# Altium PCB A8_v1.0.PcbDoc
Units mm, origin at the board's own origin, x right, y up, seen from the top; angles counter-clockwise.
Board outline 35.25 x 35.25 mm, 2 copper layers (Top Layer, Bottom Layer); 5 components, 23 nets, 58 pads, 10 vias.
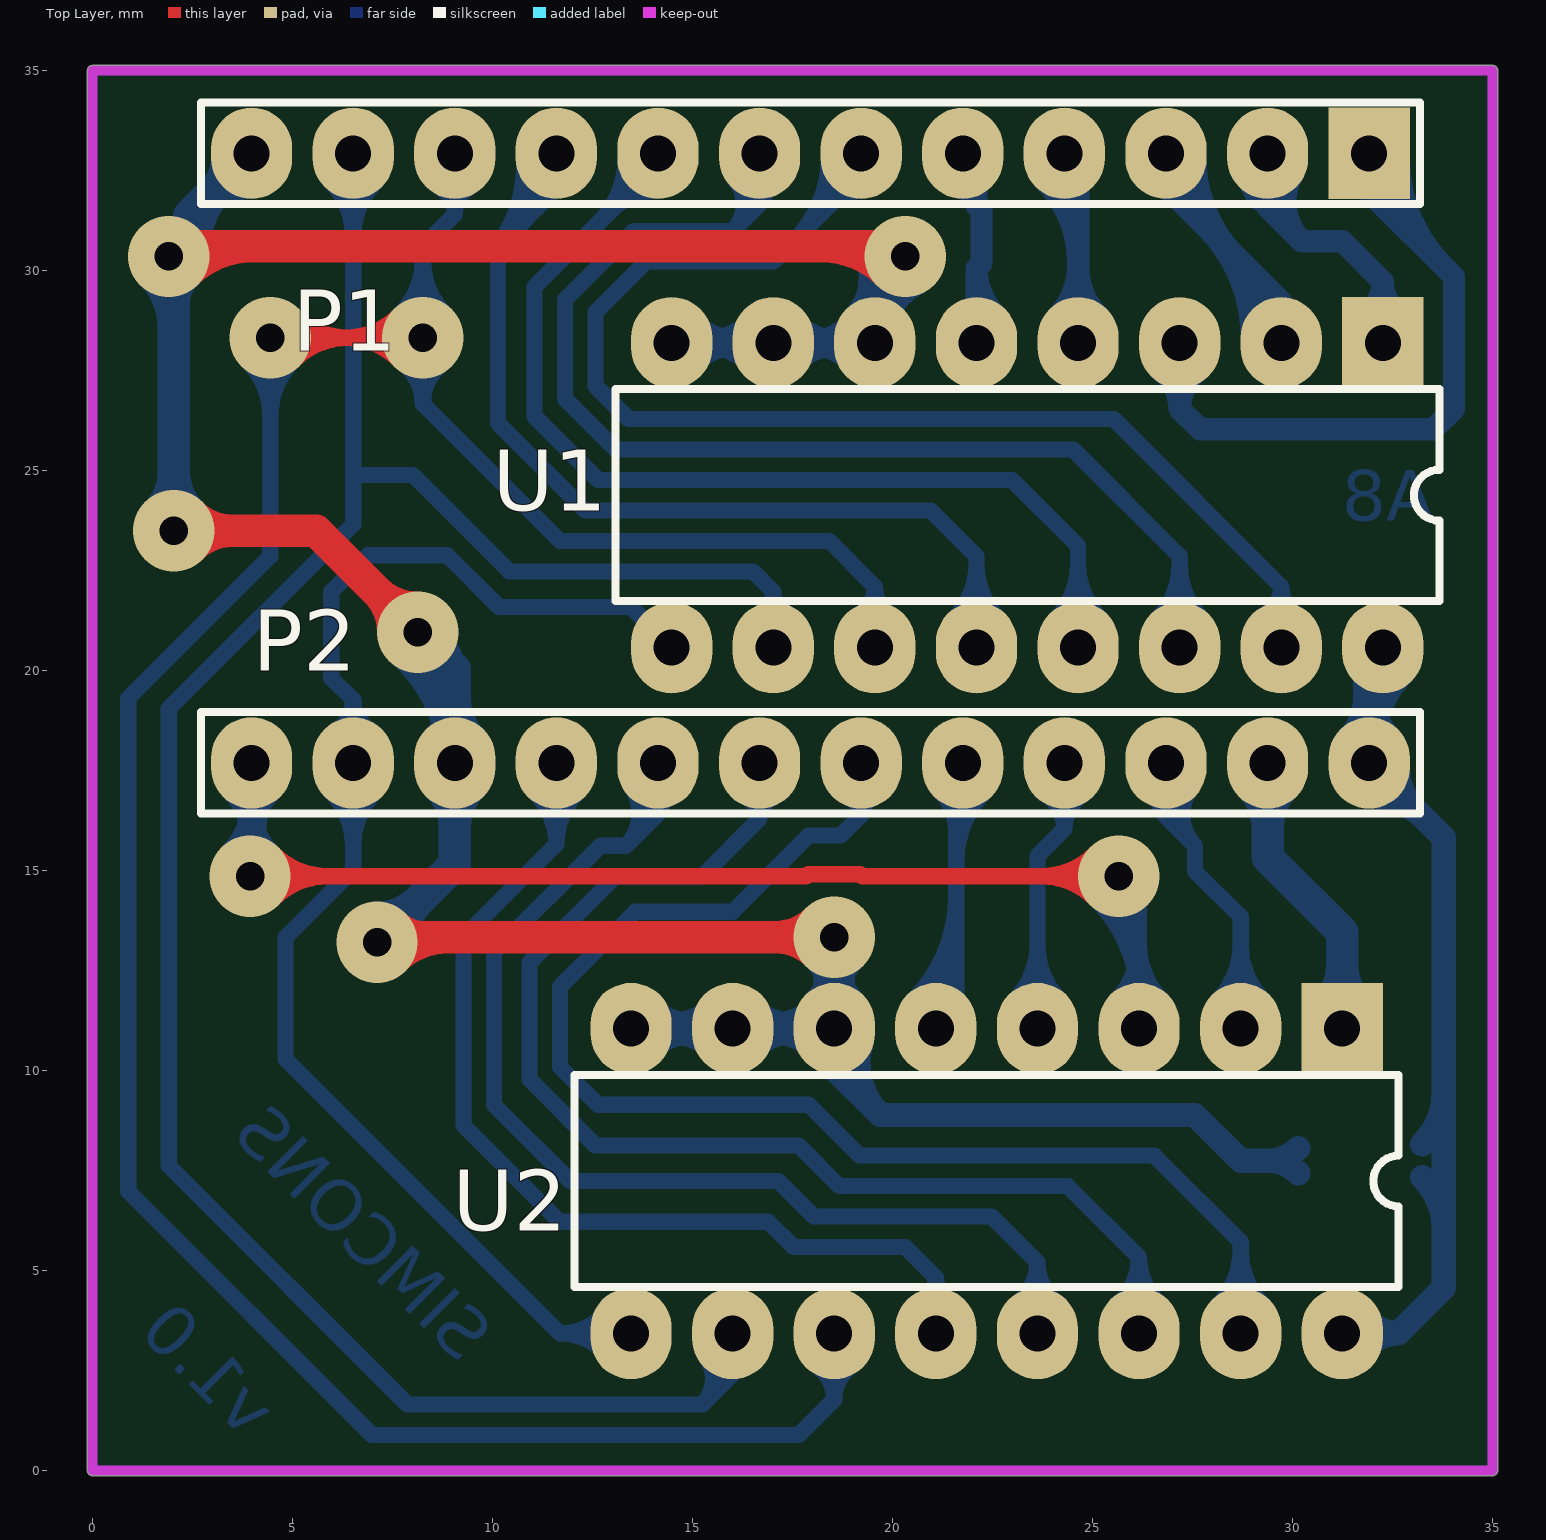
[diagram p0: Top Layer view]
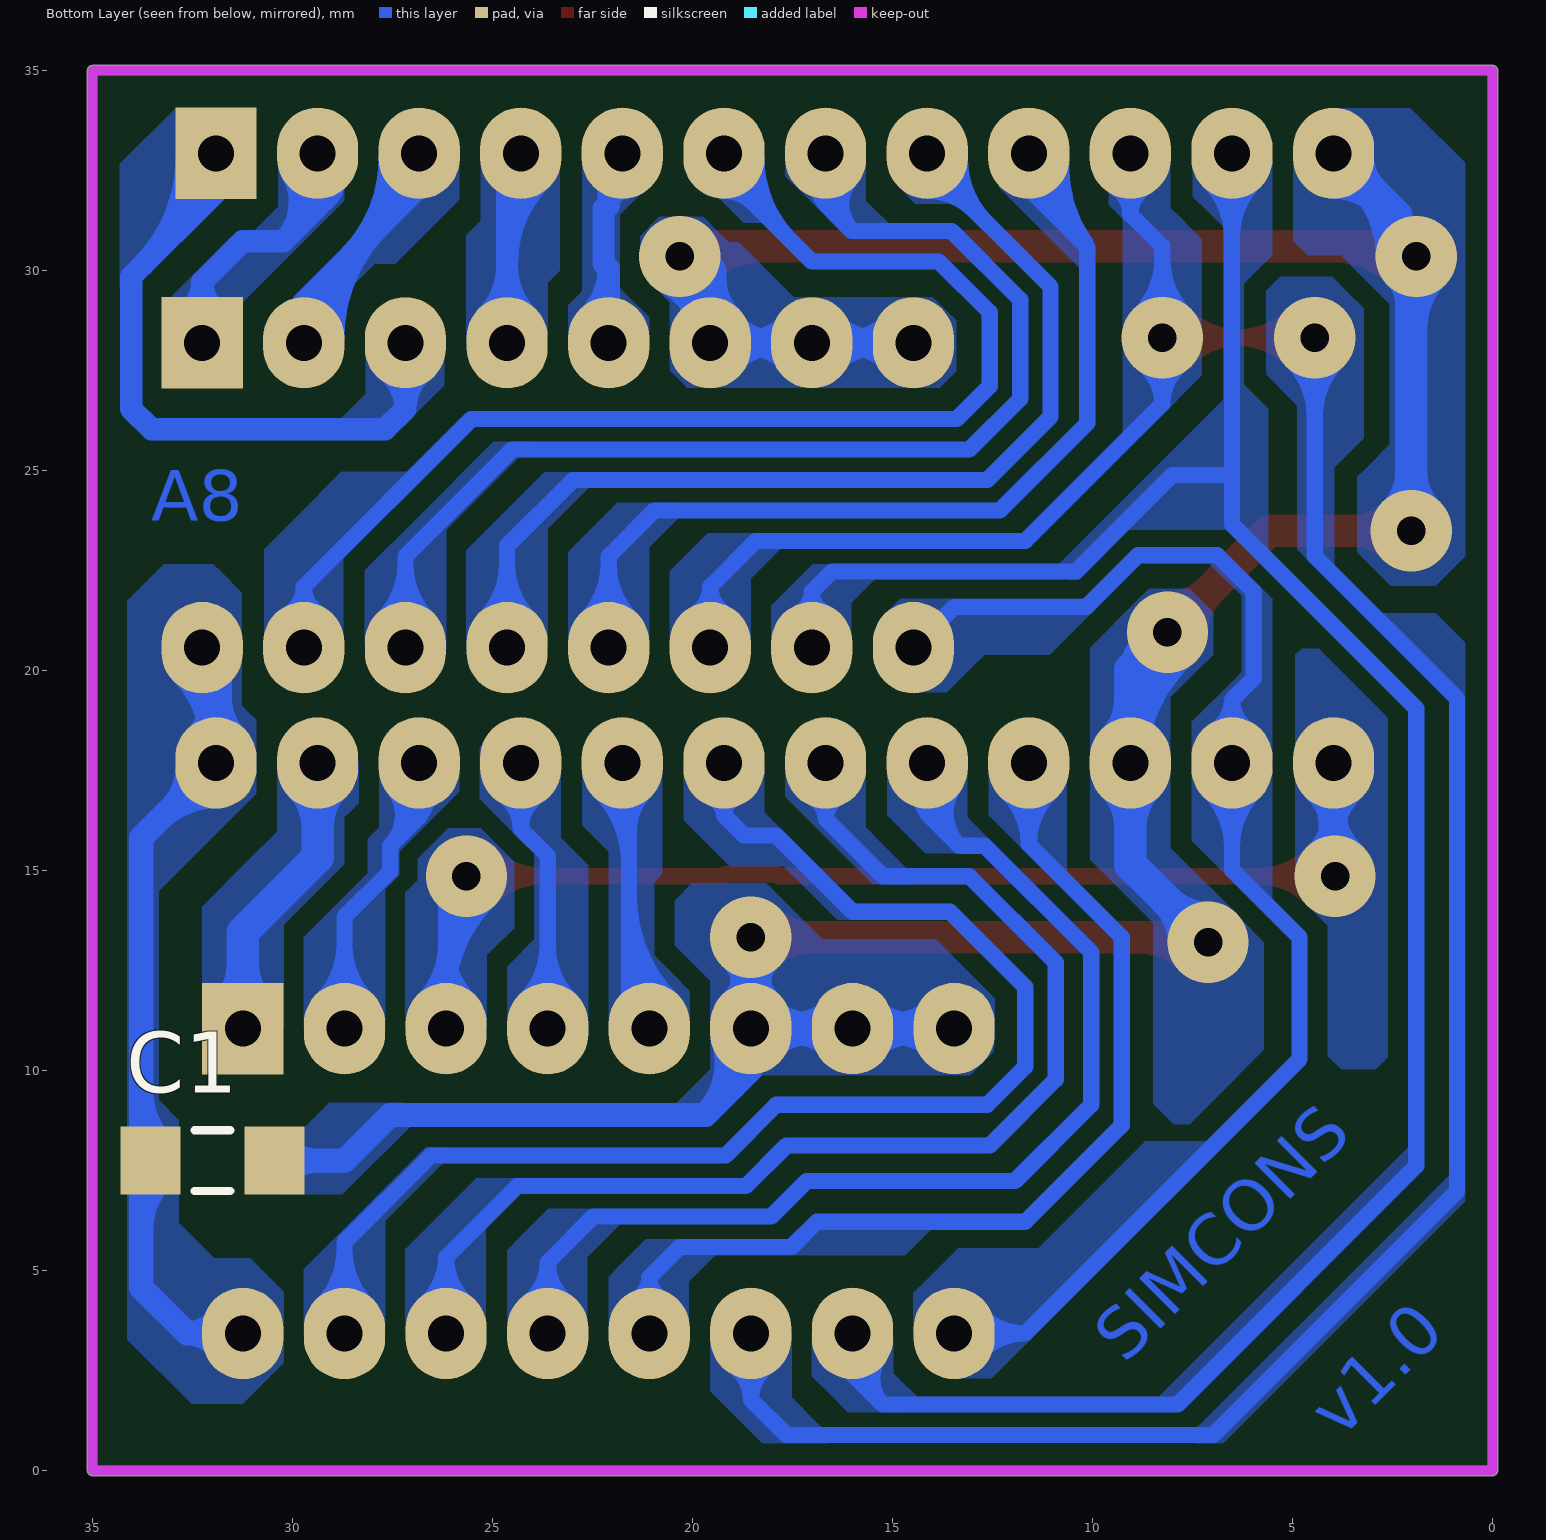
[diagram p1: Bottom Layer view, seen from below]

## Layer stack, top to bottom
Top Solder: solder mask 0.0102, Solder Resist, Dk 3.5
Top Layer: signal copper 0.0356
Dielectric 1: dielectric 0.32, FR-4, Dk 4.8
Bottom Layer: signal copper 0.0356
Bottom Solder: solder mask 0.0102, Solder Resist, Dk 3.5

## Board outline
0,-0.127 cw(c0,0) -0.127,0 -0.127,35 cw(c0,35) 0,35.127 35,35.127 cw(c35,35) 35.127,35 35.127,0 cw(c35,0) 35,-0.127

## Design rules (kind name [scope] priority, off if disabled: settings)
Clearance [All] p1: gap=0.356
PolygonConnect [All] p1: connectstyle=Direct reliefconductorwidth=0.254 reliefentries=4 polygonreliefangle="90 Angle" airgapwidth=0.254
RoutingVias [All] p1: holewidth=0.711 width=2.286 viastyle="Through Hole" minholewidth=0.711 minwidth=1.524 maxholewidth=0.711 maxwidth=2.794
SolderMaskExpansion [All] p1: expansion=0.102
Width [All] p1: maxlimit=1.626 minlimit=0.406 preferedwidth=0.813
29 further rules are at their usual default settings.

## Components (designator, comment, footprint, x,y, rotation, side; value= is the part's Value field where it differs from the comment)
C1 ".1uF 1206" C1206_W 32.004,7.747 r0 bottom
P1 "Header 12" HDR1X12#1 31.915,32.931 r180 top
P2 "Header 12" HDR1X12#2 3.975,17.691 r0 top
U1 "HCF4051BEY" DIP16 23.368,24.384 r180 top
U2 "HCF4051BEY" DIP16 22.352,7.239 r180 top

## Footprints (in the part's own frame and the unit in brackets; to place one, negate y for a bottom-side part, rotate by r counter-clockwise, add the part's x,y. Pads: shape width x height; smd on the part's side, far side on the other; paste and mask are expansions set on the pad)
C1206_W [mm] "Chip Capacitor, Body 3.2x1.6mm, IPC High Density"
  rect 1.5x1.7 smd: 1(-1.55,0) 2(1.55,0)
  silkscreen extent -0.44,-0.76 0.44,0.76, body extent -1.6,-0.8 1.6,0.8, height 1
DIP16 [mil] "DIP; 16 Leads; Row Spacing 7.62 mm; Pitch 2.54 mm"
  rect 80x90 hole 35.43: 1(-350,-150)
  oval 80x90 hole 35.43: 2(-250,-150) 3(-150,-150) 4(-50,-150) 5(50,-150) 6(150,-150) 7(250,-150) 8(350,-150) 9(350,150) 10(250,150) 11(150,150) 12(50,150) 13(-50,150) 14(-150,150) 15(-250,150) 16(-350,150)
  silkscreen extent -406,-104 406,104
HDR1X12#1 [mil] "Connector; Header; 12 Position"
  rect 80x90 hole 35.43: 1(0,0)
  oval 80x90 hole 35.43: 2(100,0) 3(200,0) 4(300,0) 5(400,0) 6(500,0) 7(600,0) 8(700,0) 9(800,0) 10(900,0) 11(1000,0) 12(1100,0)
  silkscreen extent -50,-50 1150,50
HDR1X12#2 [mil] "Connector; Header; 12 Position"
  oval 80x90 hole 35.43: 1(0,0) 2(100,0) 3(200,0) 4(300,0) 5(400,0) 6(500,0) 7(600,0) 8(700,0) 9(800,0) 10(900,0) 11(1000,0) 12(1100,0)
  silkscreen extent -50,-50 1150,50

## Part data
C1: library part Cap, "Capacitor"
P1 P2: "Header, 12-Pin"
U1 U2: "Analog Multiplexer/Demultiplexer"

## Via types
v1: diameter 2.032, hole 0.711, Top Layer to Bottom Layer, 10 vias

## Nets (pads, with @x,y where several pads share a name; then routed paths per layer and width w, separated by ;. In a path a pad name is that pad's centre, name@x,y a point inside that pad or via, vN(x,y) a via of type N, cw(c..) or ccw(c..) an arc to the next point about the centre after c; other vN are vias at no path point)
BAT: P2.7 U2.15 | length 37.9
  Bottom Layer w0.406: P2.7@18.925,16.805 cw(c18.763,16.383) 19.215,16.383 ; P2.7 19.215,16.383 ; P2.7@19.505,16.805 ccw(c19.667,16.383) 19.215,16.383 ; U2.15@28.127,4.131 ccw(c26.74,5.518) 28.702,5.518 ccw(c30.664,5.518) U2.15@29.277,4.131 ; U2.15 28.702,5.715 26.543,7.874 19.177,7.874 17.907,9.144 12.635,9.144 11.684,10.095 11.684,12.09 13.564,13.97 16.002,13.97 17.907,15.875 18.707,15.875 19.215,16.383
BTSBATT: P2.5 U2.13 | length 35.4
  Bottom Layer w0.406: P2.5@13.467,17.1 cw(c12.516,16.44) 13.335,15.621 ; 13.679,15.965 ccw(c12.922,16.722) P2.5@13.801,17.332 ; P2.5@13.868,16.796 cw(c13.738,16.421) 14.135,16.421 ; 14.023,16.309 ccw(c13.328,17.004) P2.5@14.135,17.564 ; P2.5 14.135,16.421 ; P2.5@14.402,16.796 ccw(c14.532,16.421) 14.135,16.421 ; U2.13@23.126,4.2 ccw(c22.352,5.207) 23.622,5.207 ; U2.13 23.622,5.207 ; U2.13@24.118,4.2 cw(c24.892,5.207) 23.622,5.207 ; 13.335,15.621 14.135,16.421 ; 13.335,15.621 12.7,15.621 10.033,12.954 10.033,9.144 11.938,7.239 17.145,7.239 18.034,6.35 22.479,6.35 23.622,5.207
COMM: P1.1 U1.3 | length 23.3
  Bottom Layer w0.559: U1.3@26.72,27.49 cw(c25.97,26.543) 27.178,26.543 ; U1.3 27.178,26.543 ; U1.3@27.636,27.49 ccw(c28.386,26.543) 27.178,26.543 ; P1.1 31.915,31.966 34.036,29.845 34.036,26.543 33.528,26.035 27.686,26.035 27.178,26.543 ; P1.1@32.093,32.804 ccw(c34.545,32.804) 32.811,31.07 ; P1.1@32.652,32.804 ccw(c36.453,32.804) 33.765,30.116
DG-B_: P1.5 U1.5 | length 6.5
  Bottom Layer w0.559: P1.5@21.688,32.07 cw(c21.647,31.621) 22.098,31.621 ; U1.5 22.098,30.05 ; P1.5@22.098,32.588 22.098,31.672 22.225,31.545 22.225,30.177 22.098,30.05 ; U1.5@22.608,28.852 cw(c23.759,30.05) 22.098,30.05
DG-R_: P1.7 U1.14 | length 37
  Bottom Layer w0.406: P1.7@16.055,32.278 cw(c15.328,31.662) 16.002,30.988 ; 16.314,31.3 ccw(c15.666,31.948) P1.7@16.365,32.541 ; P1.7@16.408,32.036 cw(c16.278,31.661) 16.675,31.661 ; 16.626,31.612 ccw(c16.003,32.235) P1.7@16.675,32.804 ; P1.7 16.675,31.661 ; P1.7@16.942,32.036 ccw(c17.072,31.661) 16.675,31.661 ; U1.14@26.603,21.276 ccw(c25.216,22.663) 27.178,22.663 ccw(c29.14,22.663) U1.14@27.753,21.276 ; U1.14 27.178,22.86 24.511,25.527 13.081,25.527 11.811,26.797 11.811,29.272 13.527,30.988 16.002,30.988 ; 16.002,30.988 16.675,31.661
DG-Y_: P1.6 U1.15 | length 37.4
  Bottom Layer w0.406: 17.558,30.766 ccw(c15.52,32.804) P1.6@18.402,32.804 ; 18.252,31.46 ccw(c16.908,32.804) P1.6@18.809,32.804 ; 18.478,31.686 cw(c19.215,30.949) P1.6@19.215,31.991 ; P1.6 19.215,32.423 17.018,30.226 13.843,30.226 12.573,28.956 12.573,27.113 13.397,26.289 25.527,26.289 29.718,22.098 ; U1.15@29.316,21.408 ccw(c28.924,22.098) 29.718,22.098 ; U1.15 29.718,22.098 ; U1.15@30.12,21.408 cw(c30.512,22.098) 29.718,22.098
EB-B_: P1.2 U1.1 | length 14.6
  Bottom Layer w0.559: P1.2@29.032,32.152 cw(c28.735,31.585) 29.375,31.585 ; P1.2@29.047,32.997 ccw(c29.928,32.478) 29.205,31.755 ; P1.2 29.375,31.585 ; P1.2@29.528,32.714 ccw(c30.571,32.1) 29.715,31.245 ; P1.2@29.718,32.152 ccw(c30.015,31.585) 29.375,31.585 ; P1.2@30.01,32.43 ccw(c31.214,31.722) 30.226,30.734 ; U1.1@31.842,28.929 ccw(c31.302,29.718) 32.258,29.718 ; U1.1 32.258,29.718 ; U1.1@32.674,28.929 cw(c33.214,29.718) 32.258,29.718 ; 29.375,31.585 30.226,30.734 ; 30.226,30.734 31.242,30.734 32.258,29.718
EB-R_: P1.4 U1.4 | length 10.8
  Bottom Layer w0.559: P1.4@23.774,32.283 cw(c21.689,30.198) 24.638,30.198 ; U1.4@24.117,28.842 ccw(c22.86,30.099) 24.638,30.099 ccw(c26.416,30.099) U1.4@25.159,28.842 ; P1.4@24.169,32.678 cw(c23.038,31.547) 24.638,31.547 ; U1.4 P1.4@24.638,32.588
EB-Y_: P1.3 U1.2 | length 15.5
  Bottom Layer w0.559: P1.3 26.835,32.093 29.718,29.21 U1.2 ; P1.3@27.013,32.804 ccw(c29.159,32.804) 27.641,31.287 ; P1.3@27.572,32.804 ccw(c31.066,32.804) 28.595,30.333 ; 27.832,31.096 cw(c25.057,28.321) U1.2@28.981,28.321 ; 28.786,30.142 cw(c26.965,28.321) U1.2@29.54,28.321
EMSTP: P2.8 U2.5 | length 17.6
  Bottom Layer w0.406: U2.5@20.507,11.751 ccw(c17.893,14.365) 21.59,14.365 ; U2.5@20.795,11.463 ccw(c18.874,13.384) 21.59,13.384 ; U2.5 21.59,11.557 21.59,17.526 P2.8 ; U2.5@21.082,11.176 ccw(c19.856,12.402) 21.59,12.402 ; P2.8@21.18,16.989 cw(c20.191,16) 21.59,16 ; 21.59,15.203 cw(c24.116,15.203) P2.8@22.33,16.989 ; 21.59,16.185 cw(c23.134,16.185) P2.8@22.042,17.277
FLDIR: P2.4 U2.12 | length 29.1
  Bottom Layer w0.406: P2.4@11.033,16.977 cw(c9.769,15.659) 11.595,15.659 ; P2.4 11.595,15.659 ; P2.4@12.157,16.977 ccw(c13.421,15.659) 11.595,15.659 ; U2.12@20.742,4.294 ccw(c20.496,4.826) 21.082,4.826 ; U2.12 21.082,4.826 ; U2.12@21.422,4.294 cw(c21.668,4.826) 21.082,4.826 ; 11.595,15.659 9.271,13.335 9.271,8.636 11.684,6.223 16.891,6.223 17.526,5.588 20.32,5.588 21.082,4.826
FLG: P2.6 U2.14 | length 34.5
  Bottom Layer w0.406: P2.6@16.335,16.826 cw(c16.089,16.294) 16.675,16.294 ; P2.6 16.675,16.294 ; P2.6@17.015,16.826 ccw(c17.261,16.294) 16.675,16.294 ; U2.14@25.63,4.171 ccw(c24.624,5.334) 26.162,5.334 ; U2.14 26.162,5.334 ; U2.14@26.694,4.171 cw(c27.7,5.334) 26.162,5.334 ; 16.675,16.294 15.24,14.859 13.081,14.859 10.922,12.7 10.922,9.779 12.573,8.128 17.653,8.128 18.669,7.112 24.384,7.112 26.162,5.334
FLT1: P1.8 U1.13 | length 32.5
  Bottom Layer w0.406: 12.658,31.2 ccw(c11.053,32.804) P1.8@13.322,32.804 ; 12.964,31.506 cw(c14.135,30.336) P1.8@14.135,31.991 ; 13.351,31.893 ccw(c12.441,32.804) P1.8@13.729,32.804 ; P1.8 14.135,32.677 11.049,29.591 11.049,26.351 12.635,24.765 22.987,24.765 24.638,23.114 U1.13 ; U1.13@24.063,21.276 ccw(c22.676,22.663) 24.638,22.663 ccw(c26.6,22.663) U1.13@25.213,21.276
GND: C1.1 P1.12 P2.3 U1.6 U1.7 U1.8 U2.6 U2.7 U2.8 | length 163.4
  Top Layer w0.813: v1(1.905,30.353) 2.159,30.353 2.413,30.607 20.447,30.607 20.32,30.48 v1(20.32,30.353) ; v1(2.032,23.495) 5.588,23.495 v1(8.128,20.955) ; v1@2.336,29.922 cw(c3.99,28.268) 3.99,30.607 ; v1@2.463,23.064 cw(c3.504,22.023) 3.504,23.495 cw(c3.504,24.967) v1@2.463,23.926 ; v1(7.112,13.208) 7.239,13.335 v1(18.542,13.335) ; v1@7.518,20.955 ccw(c6.047,20.955) 7.087,21.996 ccw(c8.128,23.036) v1@8.128,21.565 ; v1@7.543,12.777 cw(c8.89,11.43) 8.89,13.335 ; v1@7.543,13.639 ccw(c8.277,14.373) 8.277,13.335 ; v1@18.111,12.904 ccw(c17.07,11.863) 17.07,13.335 ccw(c17.07,14.807) v1@18.111,13.766 ; 18.235,30.607 cw(c18.235,28.268) v1@19.889,29.922
  Bottom Layer w0.559: U1.8 U1.7 U1.6 ; U1.8@14.999,27.673 cw(c16.256,26.416) 16.256,28.194 cw(c16.256,29.972) U1.8@14.999,28.715 ; 15.902,28.099 cw(c15.988,27.778) U1.7@16.309,27.868 ; 15.902,28.289 ccw(c15.988,28.61) U1.7@16.309,28.52 ; 15.963,28.115 ccw(c15.786,28.778) U1.7@16.38,28.435 ; 15.963,28.273 cw(c15.786,27.61) U1.7@16.38,27.953 ; U1.7@16.497,27.673 ccw(c15.24,26.416) 15.24,28.194 ccw(c15.24,29.972) U1.7@16.497,28.715 ; U1.7@17.539,27.673 cw(c18.796,26.416) 18.796,28.194 cw(c18.796,29.972) U1.7@17.539,28.715 ; 18.442,28.099 cw(c18.528,27.778) U1.6@18.849,27.868 ; 18.442,28.289 ccw(c18.528,28.61) U1.6@18.849,28.52 ; 18.503,28.115 ccw(c18.326,28.778) U1.6@18.92,28.435 ; 18.503,28.273 cw(c18.326,27.61) U1.6@18.92,27.953 ; U1.6@19.037,27.673 ccw(c17.78,26.416) 17.78,28.194 ccw(c17.78,29.972) U1.6@19.037,28.715
  Bottom Layer w0.61: U2.6 18.542,10.033 19.685,8.89 ; U2.6@18.639,10.893 ccw(c19.874,10.523) 18.963,9.612 ; U2.6@19.223,10.718 ccw(c20.986,10.191) 19.685,8.89 ; C1.1@29.972,7.874 29.845,7.747 28.702,7.747 27.559,8.89 19.685,8.89 ; C1.1@30.139,7.432 ccw(c29.379,6.672) 29.379,7.747 ccw(c29.379,8.822) C1.1@30.139,8.062
  Bottom Layer w0.813: v1@1.474,29.922 cw(c0.127,28.575) 2.032,28.575 ; v1@1.601,23.926 ccw(c0.56,24.967) 2.032,24.967 ccw(c3.504,24.967) v1@2.463,23.926 ; v1(2.032,23.495) 2.032,30.226 2.413,30.607 2.413,31.369 P1.12 ; 2.032,29.188 cw(c3.07,29.188) v1@2.336,29.922 ; v1@2.515,30.353 cw(c5.213,30.353) P1.12@3.305,32.261 ; 2.718,31.674 cw(c3.975,30.416) P1.12@3.975,32.194 ; 3.024,31.98 ccw(c2.2,32.804) P1.12@3.365,32.804 ; v1(7.112,13.208) 9.055,15.151 P2.3 9.055,20.028 v1(8.128,20.955) ; v1@7.112,13.818 ccw(c7.112,15.289) 8.153,14.249 ccw(c9.193,13.208) v1@7.722,13.208 ; v1@7.726,20.497 cw(c5.15,17.562) P2.3@9.055,17.562 ; v1@8.262,21.108 cw(c6.725,19.357) 9.055,19.357 ; P2.3@8.624,17.133 cw(c7.583,16.092) 9.055,16.092 cw(c10.527,16.092) P2.3@9.486,17.133 ; P2.3@8.624,18.249 ccw(c7.583,19.29) 9.055,19.29 ccw(c10.527,19.29) P2.3@9.486,18.249 ; U2.8 U2.7 U2.6 v1(18.542,13.335) ; U2.8@13.893,10.618 cw(c14.934,9.577) 14.934,11.049 cw(c14.934,12.521) U2.8@13.893,11.48 ; U2.7@15.571,10.618 ccw(c14.53,9.577) 14.53,11.049 ccw(c14.53,12.521) U2.7@15.571,11.48 ; U2.7@16.433,10.618 cw(c17.474,9.577) 17.474,11.049 cw(c17.474,12.521) U2.7@16.433,11.48 ; U2.6@18.111,10.618 ccw(c17.07,9.577) 17.07,11.049 ccw(c17.07,12.521) U2.6@18.111,11.48 ; U2.6@18.111,11.607 ccw(c17.07,12.648) 18.542,12.648 ccw(c20.014,12.648) U2.6@18.973,11.607 ; v1@18.111,12.904 cw(c17.07,11.863) 18.542,11.863 cw(c20.014,11.863) v1@18.973,12.904 ; v1@18.195,12.834 cw(c17.867,12.359) 18.425,12.21 ; v1@18.237,12.807 cw(c17.805,12.059) 18.64,12.282 ; 18.444,12.282 cw(c19.279,12.059) v1@18.847,12.807 ; 18.659,12.209 cw(c19.217,12.359) v1@18.889,12.834 ; U1.6@19.127,28.752 ccw(c18.086,29.793) 19.558,29.793 ccw(c21.03,29.793) U1.6@19.989,28.752 ; U1.6@19.558,28.064 cw(c21.545,28.064) v1@20.608,29.815 ; U1.6 19.558,29.972 19.685,29.972 v1@20.447,30.734 ; 19.558,29.42 cw(c20.819,29.42) v1@20.224,30.532 ; v1(20.32,30.353) 20.32,30.48 20.447,30.607 v1@20.447,30.734 ; v1@20.574,30.861 v1@20.447,30.734
HT: P1.9 U1.12 | length 31.7
  Bottom Layer w0.406: 10.178,30.692 ccw(c7.476,32.606) P1.9@10.783,32.765 ; 10.466,30.913 ccw(c8.714,32.665) P1.9@11.189,32.784 ; 11.115,31.562 ccw(c9.953,32.725) P1.9@11.595,32.804 ; P1.9 11.595,32.042 10.135,30.582 10.135,26.187 12.319,24.003 20.955,24.003 22.098,22.86 U1.12 ; U1.12@21.523,21.276 ccw(c20.136,22.663) 22.098,22.663 ccw(c24.06,22.663) U1.12@22.673,21.276
LLOP: P2.10 U2.2 | length 16.2
  Bottom Layer w0.406: P2.10@26.523,16.814 cw(c26.327,16.345) 26.835,16.345 ; P2.10@26.835,17.564 ccw(c27.603,16.959) 26.912,16.268 ; P2.10 26.835,16.345 ; P2.10@27.147,16.814 ccw(c27.343,16.345) 26.835,16.345 ; P2.10@27.154,17.313 ccw(c27.965,16.674) 27.235,15.945 ; P2.10@27.474,17.061 ccw(c28.327,16.389) 27.559,15.621 ; U2.2@28.127,11.751 ccw(c26.74,13.138) 28.702,13.138 ccw(c30.664,13.138) U2.2@29.277,11.751 ; U2.2 28.702,13.843 27.559,14.986 27.559,15.621 ; 26.835,16.345 27.559,15.621
REMOT: P2.9 U2.4 | length 12
  Bottom Layer w0.406: U2.4@23.047,11.751 ccw(c21.66,13.138) 23.622,13.138 ccw(c25.584,13.138) U2.4@24.197,11.751 ; U2.4 23.622,15.367 24.295,16.04 ; P2.9@23.842,16.889 cw(c23.273,16.04) 24.295,16.04 ; P2.9 24.295,16.04 ; P2.9@24.748,16.889 ccw(c25.317,16.04) 24.295,16.04
RSTART: P2.11 U2.1 | length 12
  Bottom Layer w0.813: P2.11@28.944,17.133 cw(c27.903,16.092) 29.375,16.092 cw(c30.847,16.092) P2.11@29.806,17.133 ; P2.11 29.375,15.329 31.242,13.462 U2.1 ; U2.1@30.811,11.607 ccw(c29.77,12.648) 31.242,12.648 ccw(c32.714,12.648) U2.1@31.673,11.607
S0: P1.10 U1.11 U2.11 | length 90.1
  Top Layer w0.406: v1(4.445,28.321) v1(8.255,28.321) ; v1@5.02,27.746 cw(c6.407,26.359) 6.407,28.321 cw(c6.407,30.283) v1@5.02,28.896 ; v1@7.68,27.746 ccw(c6.293,26.359) 6.293,28.321 ccw(c6.293,30.283) v1@7.68,28.896
  Bottom Layer w0.406: v1@3.87,27.746 cw(c2.483,26.359) 4.445,26.359 cw(c6.407,26.359) v1@5.02,27.746 ; v1(4.445,28.321) 4.445,22.86 0.889,19.304 0.889,6.985 6.985,0.889 17.653,0.889 18.542,1.778 ; v1@7.68,28.896 ccw(c6.293,30.283) 8.255,30.283 ccw(c10.217,30.283) v1@8.83,28.896 ; v1@7.759,27.677 cw(c6.985,26.67) 8.255,26.67 ; P1.10@8.653,32.097 cw(c8.261,31.407) 9.055,31.407 ; v1@8.751,27.677 ccw(c9.525,26.67) 8.255,26.67 ; P1.10 9.055,31.407 ; P1.10@9.457,32.097 ccw(c9.849,31.407) 9.055,31.407 ; U2.11@18.089,2.627 cw(c17.52,1.778) 18.542,1.778 ; U2.11 18.542,1.778 ; U2.11@18.995,2.627 ccw(c19.564,1.778) 18.542,1.778 ; U1.11@19.156,21.408 ccw(c18.764,22.098) 19.558,22.098 ; U1.11 19.558,22.098 ; U1.11@19.96,21.408 cw(c20.352,22.098) 19.558,22.098 ; 8.255,26.67 11.684,23.241 18.415,23.241 19.558,22.098 ; 8.255,26.67 v1(8.255,28.321) 8.255,30.607 9.055,31.407
S1: P1.11 U1.10 U2.10 | length 65.1
  Bottom Layer w0.406: P1.11@5.94,32.229 cw(c4.553,30.842) 6.515,30.842 cw(c8.477,30.842) P1.11@7.09,32.229 ; P1.11 6.515,24.892 ; U2.10@15.339,2.831 cw(c14.591,2.3) 15.24,1.651 ; 15.58,1.991 ccw(c14.989,2.582) U2.10@15.671,3.067 ; U2.10 16.002,2.413 15.24,1.651 ; U1.10@16.678,21.439 ccw(c16.432,21.971) 17.018,21.971 ; U1.10 17.018,21.971 ; U1.10@17.358,21.439 cw(c17.604,21.971) 17.018,21.971 ; 6.515,24.892 6.515,23.66 1.905,19.05 1.905,7.62 7.874,1.651 15.24,1.651 ; 6.515,24.892 8.001,24.892 10.414,22.479 16.51,22.479 17.018,21.971
S2: P2.2 U1.9 U2.9 | length 41.5
  Bottom Layer w0.406: P2.2@5.94,16.989 cw(c4.553,15.602) 6.515,15.602 cw(c8.477,15.602) P2.2@7.09,16.989 ; P2.2@6.092,18.512 ccw(c5.632,19.266) 6.515,19.266 ; P2.2@6.938,18.512 cw(c7.398,19.266) 6.515,19.266 ; U2.9@12.847,2.897 ccw(c11.684,1.891) 11.684,3.429 ; U2.9@12.847,3.961 cw(c11.684,4.967) 11.684,3.429 ; U2.9 11.684,3.429 ; U1.9 13.462,21.59 10.16,21.59 8.865,22.885 6.883,22.885 5.969,21.971 5.969,19.812 6.515,19.266 ; 6.515,19.266 P2.2 6.515,15.024 4.826,13.335 4.826,10.287 11.684,3.429
S3: P2.1 U2.3 | length 54.7
  Top Layer w0.406: v1(3.937,14.859) 17.839,14.859 17.89,14.91 19.194,14.91 19.245,14.859 v1(25.654,14.859) ; v1@4.512,14.284 cw(c5.899,12.897) 5.899,14.859 cw(c5.899,16.821) v1@4.512,15.434 ; v1@25.079,14.284 ccw(c23.692,12.897) 23.692,14.859 ccw(c23.692,16.821) v1@25.079,15.434
  Bottom Layer w0.406: v1@3.362,15.434 ccw(c1.883,16.913) P2.1@3.975,16.913 ; P2.1@3.4,16.989 cw(c2.013,15.602) 3.975,15.602 cw(c5.937,15.602) P2.1@4.55,16.989 ; v1@3.546,15.572 ccw(c3.281,16.057) 3.815,16.2 ccw(c4.768,16.455) v1@4.312,15.58 ; v1@3.569,15.584 ccw(c3.04,16.625) 4.168,16.323 ccw(c4.934,16.117) v1@4.442,15.496 ; v1@3.65,15.146 ccw(c2.864,15.932) 3.975,15.932 ; P2.1@3.975,16.73 ccw(c5.808,16.73) v1@4.512,15.434 ; P2.1 3.975,15.113 3.937,15.113 v1@4.064,14.986 ; v1@25.079,14.284 cw(c22.465,11.67) U2.3@26.162,11.67 ; v1@25.367,14.572 cw(c23.446,12.651) 26.162,12.651 ; U2.3@25.587,11.751 ccw(c24.2,13.138) 26.162,13.138 ccw(c28.124,13.138) U2.3@26.737,11.751 ; U2.3 26.162,14.351 v1(25.654,14.859) cw(c24.428,13.633) 26.162,13.633
VCC: C1.2 P2.12 U1.16 U2.16 | length 31.8
  Bottom Layer w0.61: U2.16 32.639,3.429 ; U2.16@31.817,3.011 cw(c32.639,2.413) 32.639,3.429 ; U2.16@31.817,3.847 ccw(c32.639,4.445) 32.639,3.429 ; P2.12@31.915,16.853 cw(c31.915,14.829) 33.346,16.26 ; P2.12 33.782,15.824 33.782,4.572 32.639,3.429 ; P2.12@32.626,17.564 ccw(c34.037,17.564) 33.039,16.567 ; C1.2@33.239,7.332 cw(c31.929,6.022) 33.782,6.022 ; C1.2@33.239,8.162 ccw(c31.929,9.472) 33.782,9.472
  Bottom Layer w0.813: P2.12@31.484,18.249 ccw(c30.443,19.29) 31.915,19.29 ccw(c33.387,19.29) P2.12@32.346,18.249 ; P2.12 31.915,20.231 U1.16 ; P2.12@31.915,18.147 cw(c34.558,18.147) U1.16@32.689,20.016
copper on no net: | length 139.9
  Bottom Layer w0.254: 0,0 0,35 35,35 35,0 0.138,0

## Polygon pours and split planes (outlines as drawn)
DG-B_ on Bottom Layer "Top Layer-No Net 1" (solid, remove dead copper, pour order 2): 21.946,31.267 21.057,32.156 21.057,32.918 22.657,32.918 22.758,33.02 22.758,29.489 22.835,29.413 23.114,29.134 23.114,28.143 22.581,28.143 21.971,28.753 21.844,28.88 21.844,29.997 21.844,30.15 22.022,30.328
COMM on Bottom Layer "Top Layer-No Net 1" (solid, remove dead copper, pour order 4): 26.213,27.94 26.213,27.127 27.457,25.883 27.483,25.857 29.54,25.857 29.54,26.238 29.489,26.289 28.804,26.289 28.321,26.772 28.169,26.924 28.169,28.245 26.772,28.245 26.619,28.397
EB-B_ on Bottom Layer "Top Layer-No Net 1" (solid, remove dead copper, pour order 6): 31.267,29.185 28.702,31.75 28.702,31.928 28.702,32.563 28.956,32.817 29.464,32.309 29.515,32.309 30.175,32.969 30.226,32.918 30.277,32.918 30.353,32.842 30.353,31.598 31.115,30.836 31.547,30.836 33.045,29.337 33.122,29.261 33.122,28.829
GND on Bottom Layer "Top Layer-No Net 1" (solid, remove dead copper, pour order 8): 20.422,31.344 19.736,31.344 19.329,30.937 19.101,30.709 18.847,30.709 17.475,29.337 16.535,29.337 13.995,29.337 13.64,28.981 13.411,28.753 13.411,27.915 13.411,27.483 13.818,27.076 20.142,27.076 20.218,27.153 20.574,27.508 20.574,28.854 20.574,29.21 21.133,29.769 21.133,30.226 21.311,30.404 21.311,30.861 20.853,31.318 20.828,31.344 20.269,31.344
S0 on Bottom Layer "Top Layer-No Net 1" (solid, remove dead copper, pour order 10): 8.052,32.842 8.052,31.572 7.798,31.318 7.518,31.039 7.264,30.785 7.264,27.889 7.264,27.381 8.433,26.213 8.788,25.857 9.195,25.857 9.296,25.756 9.246,25.806 9.246,28.956 9.246,31.293 9.601,31.648 9.601,31.953 9.855,32.207 9.855,33.172
S1 on Bottom Layer "Top Layer-No Net 1" (solid, remove dead copper, pour order 12): 7.493,32.918 7.493,31.852 7.112,31.471 6.731,31.09 6.731,30.48 6.731,26.772 8.611,24.892 11.024,22.479 11.252,22.479 10.795,22.479 10.592,22.276 10.338,22.276 8.966,23.647 6.96,23.647 6.756,23.647 6.502,23.393 5.944,22.835 5.613,22.835 5.613,26.543 6.223,27.153 6.223,29.134 6.223,31.115 5.842,31.496 5.512,31.826 5.512,32.944
GND on Bottom Layer "Top Layer-No Net 1" (solid, remove dead copper, pour order 14): 4.978,32.918 4.978,31.572 4.496,31.09 2.565,29.159 2.565,28.778 2.565,25.654 3.15,25.07 3.378,24.841 3.378,23.165 3.378,22.962 2.667,22.25 2.54,22.123 1.727,22.123 1.422,22.123 0.711,22.835 0.686,22.86 0.686,24.562 0.686,32.69 1.93,33.934 2.057,34.061 4.013,34.061 4.039,34.061 4.623,33.477
S0 on Bottom Layer "Top Layer-No Net 1" (solid, remove dead copper, pour order 16): 4.318,22.479 4.877,23.038 4.877,24.13 4.877,26.619 5.258,27 5.436,27.178 5.664,27.407 5.664,28.905 5.664,29.489 5.512,29.642 5.309,29.845 4.623,29.845 4.013,29.845 3.607,29.439 3.226,29.058 3.226,28.194 3.226,25.806 3.632,25.4 3.962,25.07 3.962,23.063 3.962,22.504 3.759,22.301
S1 on Bottom Layer "Top Layer-No Net 1" (solid, remove dead copper, pour order 18): 6.299,23.165 6.655,23.52 9.296,23.52 9.296,23.901 8.712,24.486 8.433,24.765 6.68,24.765 6.68,24.587 6.096,24.003
S2 on Bottom Layer "Top Layer-No Net 1" (solid, remove dead copper, pour order 20): 7.518,17.653 7.518,18.72 6.401,19.837 6.274,19.964 6.274,21.387 6.274,21.869 7.137,22.733 6.985,22.885 6.883,22.885 6.604,22.885 5.486,21.768 5.512,21.742 5.512,17.729
S2 on Bottom Layer "Top Layer-No Net 1" (solid, remove dead copper, pour order 22): 7.518,17.836 7.518,15.748 6.477,14.707 6.375,14.605 5.817,14.605 5.664,14.453 5.207,13.995 5.207,13.97 5.512,14.275 5.512,15.342 5.512,17.602 5.867,17.958
S2 on Bottom Layer "Top Layer-No Net 1" (solid, remove dead copper, pour order 24): 5.842,14.199 5.766,14.122 5.486,14.122 5.512,14.148 5.512,15.011 6.299,15.011 6.553,15.265
S2 on Bottom Layer "Top Layer-No Net 1" (solid, remove dead copper, pour order 26): 14.605,19.456 13.64,19.456 13.03,20.066 12.7,20.396 11.659,20.396 11.074,20.396 9.804,21.666 9.931,21.793 14.3,21.793 14.808,21.793 15.215,21.387 15.088,21.26 15.088,20.218
S1 on Bottom Layer "Top Layer-No Net 1" (solid, remove dead copper, pour order 28): 16.027,20.599 16.027,21.692 15.367,22.352 15.672,22.657 15.697,22.657 16.993,22.657 17.678,21.971 18.034,21.615 18.034,20.701
S0 on Bottom Layer "Top Layer-No Net 1" (solid, remove dead copper, pour order 30): 18.542,20.523 18.542,22.301 18.034,22.809 17.577,23.266 17.272,23.266 17.348,23.266 17.526,23.444 19.609,23.444 20.142,22.911 20.574,22.479 20.574,20.599
HT on Bottom Layer "Top Layer-No Net 1" (solid, remove dead copper, pour order 32): 21.082,20.549 21.082,23.089 20.32,23.851 20.269,23.901 20.269,24.206 21.869,24.206 22.835,23.241 23.114,22.962 23.114,20.625
FLT1 on Bottom Layer "Top Layer-No Net 1" (solid, remove dead copper, pour order 34): 23.622,20.549 23.622,23.546 22.885,24.282 22.504,24.663 22.2,24.663 22.301,24.663 22.606,24.968 23.698,24.968 24.689,23.978 25.654,23.012 25.654,20.549
DG-R_ on Bottom Layer "Top Layer-No Net 1" (solid, remove dead copper, pour order 36): 26.162,20.523 26.162,23.52 24.994,24.689 24.257,25.425 24.028,25.425 24.028,25.679 24.079,25.73 24.968,25.73 26.899,23.8 28.194,22.504 28.194,20.447
DG-Y_ on Bottom Layer "Top Layer-No Net 1" (solid, remove dead copper, pour order 38): 28.727,20.498 28.727,22.86 28.169,23.419 26.568,25.019 26.568,25.375 26.975,24.968 28.499,24.968 28.778,24.968 29.87,23.876 30.709,23.038 30.709,20.498
GND on Bottom Layer "Top Layer-No Net 1" (solid, pour order 40): 4.978,31.572 4.978,30.734 4.724,30.48 4.623,30.378 3.505,30.378 3.505,31.318 3.962,31.775
S1 on Bottom Layer "Top Layer-No Net 1" (solid, remove dead copper, pour order 42): 5.512,31.852 5.512,30.378 6.045,29.845 6.426,29.464 6.426,31.09 6.579,31.242 6.655,31.318 6.655,32.283 5.715,32.283 5.512,32.487
COMM on Bottom Layer "Top Layer-No Net 1" (solid, remove dead copper, pour order 44): 31.267,34.061 32.918,34.061 34.315,32.664 34.315,29.388 34.163,29.388 33.96,29.591 31.267,32.283 31.242,32.283
EB-R_ on Bottom Layer "Top Layer-No Net 1" (solid, remove dead copper, pour order 46): 25.654,28.194 25.654,30.886 25.324,31.217 25.298,31.242 25.298,32.868 23.393,32.868 23.317,32.944 23.317,29.997 23.597,29.718 23.622,29.693 23.622,28.169
EB-Y_ on Bottom Layer "Top Layer-No Net 1" (solid, remove dead copper, pour order 48): 27.991,30.886 26.721,30.886 26.238,31.369 25.832,31.775 25.832,32.868 27.508,32.868 27.711,33.071 27.737,33.045 27.737,31.547 27.737,31.344 28.169,30.912
EB-Y_ on Bottom Layer "Top Layer-No Net 1" (solid, remove dead copper, pour order 50): 26.721,30.886 27.432,30.175 27.889,30.175 27.94,30.175 28.575,29.54 28.778,29.743 29.337,29.743 29.337,29.947 27.737,31.547 27.711,31.521 26.594,31.521
GND on Bottom Layer "Top Layer-No Net 1" (solid, remove dead copper, pour order 52): 6.375,13.894 8.052,15.57 8.052,17.628 8.052,19.329 7.391,19.99 6.985,20.396 6.985,21.234 6.985,21.463 7.569,22.047 8.585,22.047 8.915,21.717 10.058,20.574 10.058,17.45 10.058,15.265 8.814,14.021 8.484,13.691 8.484,12.649 7.671,11.836 6.375,11.836 6.071,11.836 5.715,12.192 5.715,13.208 6.35,13.843
GND on Bottom Layer "Top Layer-No Net 1" (solid, remove dead copper, pour order 54): 8.484,12.649 8.484,9.169 7.976,8.661 7.569,8.661 6.96,9.271 5.715,10.516 5.715,13.208 8.484,13.208
S3 on Bottom Layer "Top Layer-No Net 1" (solid, remove dead copper, pour order 56): 4.928,14.834 4.928,20.396 4.775,20.549 4.343,20.549 3.658,19.863 2.616,18.821 2.616,17.729 2.616,10.338 2.921,10.033 3.785,10.033 4.115,10.363 4.115,12.141 4.115,13.614 4.775,14.275 4.724,14.326 4.724,14.783
S3 on Bottom Layer "Top Layer-No Net 1" (solid, pour order 58): 3.433,10.033 3.785,10.033 4.115,10.363 3.734,10.744 3.734,10.77 3.404,10.77 3.099,10.465
S0 on Bottom Layer "Top Layer-No Net 1" (solid, pour order 60): 0.686,19.152 0.686,20.701 1.422,21.438 2.819,21.438 3.48,22.098 3.556,22.022 3.556,21.869
S0 on Bottom Layer "Top Layer-No Net 1" (solid, pour order 62): 17.526,3.454 17.526,1.829 16.942,1.245 16.688,0.991 16.332,0.991 16.332,0.965 16.612,0.686 18.263,0.686 19.482,1.905 19.558,1.981 19.558,3.454
S1 on Bottom Layer "Top Layer-No Net 1" (solid, pour order 64): 14.986,3.404 14.986,2.438 14.3,1.753 14.605,1.448 15.265,1.448 16.104,1.448 16.535,1.88 17.018,2.362 17.018,3.454
S1 on Bottom Layer "Top Layer-No Net 1" (solid, pour order 66): 8.687,1.524 8.001,1.524 7.874,1.651 2.057,7.468 2.057,8.128 4.191,5.994 8.407,1.778 8.788,1.778
S2 on Bottom Layer "Top Layer-No Net 1" (solid, pour order 68): 13.462,2.311 12.522,2.311 10.998,3.835 6.909,7.925 6.909,8.306 6.985,8.23 7.823,8.23 8.687,8.23 9.22,7.696 11.354,5.563 12.776,5.563 13.36,5.563 14.199,4.724 14.478,4.445 14.478,3.429
FLDIR on Bottom Layer "Top Layer-No Net 1" (solid, pour order 70): 12.598,17.729 12.598,16.383 11.582,15.367 11.151,14.935 10.668,14.935 10.643,14.961 10.643,17.78
BTSBATT on Bottom Layer "Top Layer-No Net 1" (solid, pour order 72): 12.446,15.646 13.132,16.332 13.132,17.805 15.113,17.805 15.138,17.78 15.138,16.383 14.961,16.205 14.173,15.418 12.598,15.418
FLG on Bottom Layer "Top Layer-No Net 1" (solid, pour order 74): 15.672,17.704 15.672,16.078 15.215,15.621 14.605,15.011 14.605,14.656 15.494,14.656 17.196,16.358 17.678,16.84 17.678,17.78
BAT on Bottom Layer "Top Layer-No Net 1" (solid, pour order 76): 17.272,15.519 18.212,16.459 18.212,17.577 20.041,17.577 20.218,17.755 20.218,16.256 19.406,15.443 19.075,15.113 18.161,15.113 17.729,15.113 17.196,14.58 16.383,13.767 15.85,13.767 15.85,13.995 15.799,14.046
GND on Bottom Layer "Top Layer-No Net 1" (solid, pour order 78): 12.446,10.998 12.446,11.811 13.767,13.132 13.919,13.284 16.154,13.284 16.764,13.284 17.399,13.919 18.161,14.681 18.72,14.681 20.015,14.681 20.396,14.3 20.447,14.249 20.447,13.411 20.447,13.132 19.787,12.471 19.558,12.243 19.558,10.947 19.558,10.033 20.218,9.373 20.549,9.042 20.549,8.611 19.533,8.611 19.355,8.788 18.263,9.881 15.875,9.881 13.056,9.881 12.471,10.465
EMSTP on Bottom Layer "Top Layer-No Net 1" (solid, pour order 80): 20.752,17.678 20.752,14.91 20.853,14.808 20.955,14.707 20.955,13.36 20.955,12.878 20.472,12.395 20.066,11.989 20.066,10.998 22.098,10.998 22.098,15.469 22.631,16.002 22.758,16.129 22.758,17.729
REMOT on Bottom Layer "Top Layer-No Net 1" (solid, pour order 82): 23.292,17.729 23.292,15.824 23.165,15.697 22.606,15.138 22.606,10.998 24.638,10.998 24.638,12.598 24.536,12.7 23.952,13.284 23.952,15.037 23.952,15.418 24.892,16.358 25.324,16.789 25.324,17.704 25.324,18.085 24.994,18.415
S3 on Bottom Layer "Top Layer-No Net 1" (solid, pour order 84): 25.146,11.049 25.146,12.878 24.968,13.056 24.46,13.564 24.46,15.037 24.46,15.215 25.298,16.053 26.111,16.053 26.441,15.723 26.873,15.291 26.873,15.265 26.873,14.757 27.076,14.554 27.178,14.453 27.178,11.074
LLOP on Bottom Layer "Top Layer-No Net 1" (solid, pour order 86): 27.686,10.998 27.686,14.529 27.356,14.859 27.33,14.884 27.33,15.469 25.832,16.967 25.832,17.729 27.838,17.729 27.838,15.215 28.931,14.122 29.718,13.335 29.718,11.024
LLOP on Bottom Layer "Top Layer-No Net 1" (solid, pour order 88): 27.737,16.18 28.118,15.799 28.118,15.392 28.118,14.707 28.473,14.351 27.838,14.986 27.559,14.986
RSTART on Bottom Layer "Top Layer-No Net 1" (solid, pour order 90): 30.226,11.074 30.226,13.64 29.82,14.046 28.702,15.164 28.702,15.748 28.702,16.332 28.55,16.485 28.346,16.688 28.346,17.729 30.378,17.729 30.378,15.977 31.115,15.24 32.258,14.097 32.258,10.414
VCC on Bottom Layer "Top Layer-No Net 1" (solid, pour order 92): 30.912,17.755 30.912,18.771 31.191,19.05 31.267,19.126 31.267,20.65 31.267,21.946 31.801,22.479 31.979,22.657 32.715,22.657 33.223,22.657 33.604,22.276 34.138,21.742 34.138,11.481 34.138,3.277 32.563,1.702 32.537,1.676 31.242,1.676 30.226,2.692 30.226,3.404 30.226,4.47 31.064,5.309 31.953,5.309 32.69,6.045 32.842,6.198 32.842,8.56 32.842,8.763 33.35,9.271 33.35,11.481 33.35,14.478 32.588,15.24 30.912,16.916 30.912,17.653
GND on Bottom Layer "Top Layer-No Net 1" (solid, pour order 94): 30.353,6.909 28.753,6.909 26.848,8.814 27.229,9.195 27.457,9.195 29.083,9.195 29.87,8.407 30.099,8.179 30.48,8.179
FLDIR on Bottom Layer "Top Layer-No Net 1" (solid, pour order 96): 20.091,3.454 20.091,4.724 19.456,5.359 19.431,5.385 18.593,5.385 14.681,5.385 14.376,5.69 13.792,6.274 13.386,6.274 16.942,6.274 17.221,5.994 17.526,5.69 19.609,5.69 20.091,5.69 20.193,5.791 21.158,5.791 21.869,5.08 22.098,4.851 22.098,3.454
BTSBATT on Bottom Layer "Top Layer-No Net 1" (solid, pour order 98): 22.631,3.48 22.631,5.334 21.717,6.248 22.022,6.553 22.2,6.553 22.86,6.553 23.597,6.553 24.333,5.817 24.638,5.512 24.638,3.429
FLG on Bottom Layer "Top Layer-No Net 1" (solid, pour order 100): 25.171,3.429 25.171,6.147 24.663,6.655 24.181,7.137 24.181,7.315 25.4,7.315 26.695,6.02 27.178,5.537 27.178,3.378
BAT on Bottom Layer "Top Layer-No Net 1" (solid, pour order 102): 27.686,3.404 27.686,6.248 26.238,7.696 26.111,7.823 26.111,8.077 26.67,8.077 28.905,5.842 29.718,5.029 29.718,3.378
HT on Bottom Layer "Top Layer-No Net 1" (solid, pour order 104): 10.287,30.023 12.344,32.08 12.344,32.41 11.989,32.41 11.595,32.804 10.592,31.801 10.592,31.115 10.592,31.039 10.135,30.582 10.084,30.531 10.084,30.023
FLT1 on Bottom Layer "Top Layer-No Net 1" (solid, pour order 106): 13.487,31.674 14.427,31.674 14.859,32.106 14.554,32.41 13.919,32.41 13.589,32.41 13.462,32.283
DG-R_ on Bottom Layer "Top Layer-No Net 1" (solid, pour order 108): 14.554,31.09 15.011,31.09 15.596,31.674 15.672,31.75 15.672,32.969 17.678,32.969 17.678,32.36 17.196,31.877 16.104,30.785 15.85,30.785
DG-Y_ on Bottom Layer "Top Layer-No Net 1" (solid, pour order 110): 18.136,31.191 18.72,31.191 18.999,31.471 19.736,32.207 19.736,32.283 19.609,32.283 18.974,32.918 18.263,32.207 18.263,31.623 18.263,31.572 18.009,31.318
DG-B_ on Bottom Layer "Top Layer-No Net 1" (solid, pour order 112): 21.082,28.143 21.082,28.829 21.641,29.388 21.819,29.566 21.819,29.794 21.819,31.953 21.539,32.233 22.504,31.267 22.504,30.836 22.581,30.759 22.581,28.143
S0 on Bottom Layer "Top Layer-No Net 1" (solid, pour order 114): 7.442,0.686 6.731,0.686 5.817,1.6 0.686,6.731 0.686,7.417 1.041,7.417 2.235,6.223 7.493,0.965 7.645,0.965
S0 on Bottom Layer "Top Layer-No Net 1" (solid, pour order 116): 0.686,7.417 0.686,20.549 0.914,20.777 0.965,20.726 0.965,19.71 0.965,6.782 1.092,6.655

## Keep-outs
Keep-Out Layer:
  lines w0.254: 0,0 0,35 35,35 35,0 0,0

## Other copper
Bottom Layer:
  text "A8" at 33.528,23.749 h1.27
  text "SIMCONS" at 9.195,2.642 h1.27 r315
  text "v1.0" at 3.81,0.762 h1.27 r315